# EAGLE board Kicker (EAGLE 8.0.2)

Size 160 x 100 mm. Coordinates in mm from the lower left corner, seen from the top.
Outline: 0,0 160,0 160,100 0,100 0,0
Copper layers (1*16): Top 0.035mm / dielectric 1.5mm / Bottom 0.035mm
Design rules "default": minimum track width 10mil, minimum drill 24mil, track to track 8mil, track to pad 8mil, pad to pad 8mil, via to via 8mil, smd to smd 8mil, copper to edge 40mil, drill to drill 8mil, minimum pad ring 10mil, minimum via ring 8mil, stop-mask expansion 4mil, vias tented up to drill 0mil, thermal gap 10mil

## Footprints (pad centres in the part's own frame; a part is rotated, then mirrored left to right if it is on the bottom)
EB22,5D = drill 2.007 pad 4.597: + -5.08,0 | drill 2.007 pad 4.597 octagon: - 5.08,0
DO41-10 = drill 1.118: A 5.08,0; C -5.08,0
G5LE = drill 1.321 long: 1 -7.493,-5.969; 2 -7.493,5.969; O 4.699,5.969; P -9.525,0; S 4.699,-5.969
B2P-VH = drill 1.7 square: 1 -1.98,0 | drill 1.7: 2 1.98,0
TO92 = drill 0.813 octagon: 1 1.27,0; 2 0,1.905; 3 -1.27,0
0603-RES = smd 1.1 x 1: 1 -0.85,0; 2 0.85,0
0805 = smd 0.8 x 1.2: 1 -0.9,0; 2 0.9,0
B2B-PH-K-S = drill 0.8 square: 1 -1,0 | drill 0.8: 2 1,0

## Placement (x,y rotation side)
C1  3300uF  [EB22,5D]  -15.24,-55.88 0 top  (outside the outline)
D1  1N4004  [DO41-10]  -29.21,-87.63 0 top  (outside the outline)
D2  1N4004  [DO41-10]  -29.21,-105.41 0 top  (outside the outline)
K1  G5LE  [G5LE]  -22.86,-16.51 0 top  (outside the outline)
KICKER_PWR  [B2P-VH]  -22.86,36.83 0 top  (outside the outline)
Q1  BSS92  [TO92]  -53.93,0 0 top  (outside the outline)
R1  1K  [0603-RES]  -15.24,44.45 0 top  (outside the outline)
R2  100K  [0805]  -41.91,2.54 0 top  (outside the outline)
SIGNAL  [B2B-PH-K-S]  -31.75,35.56 0 top  (outside the outline)
SOLENOID_OUT  [B2P-VH]  -25.4,25.4 0 top  (outside the outline)

## Library data of the parts
C1 = rcl
D1 D2 = diode
K1 = relay; OC_FARNELL: unknown; OC_NEWARK: unknown
KICKER_PWR SOLENOID_OUT = jst-vh
Q1 = transistor-fet
R1 R2 = SparkFun-Resistors
SIGNAL = jst-ph

## Nets
GND: C1.- KICKER_PWR.2 Q1.3 R2.1
N$2: Q1.1 R1.2
N$3: D1.A K1.2 Q1.2
N$5: C1.+ K1.P
SOLENOID+: D2.C K1.S SOLENOID_OUT.1
SOLENOID-: D2.A SOLENOID_OUT.2
TRIGGER: R1.1 R2.2 SIGNAL.1
VCC: D1.C K1.1 K1.O KICKER_PWR.1

## Tracks (layer width: path | path; a pad name or v marks a point on that pad's centre or on a via)
GND  (3 unrouted)
N$2  (1 unrouted)
N$3  (2 unrouted)
N$5  (1 unrouted)
SOLENOID+  (2 unrouted)
SOLENOID-  (1 unrouted)
TRIGGER  (2 unrouted)
VCC  (3 unrouted)